# Altium PCB Backplane_PCB_v2.PcbDoc (part 1 of 2)
Units mm, origin at the board's own origin, x right, y up, seen from the top; angles counter-clockwise.
Board outline 92.34 x 177.99 mm, 4 copper layers (Top Layer, Signal Layer 1, Internal Plane 1, Bottom Layer), stack 1.47 mm thick; 65 components, 43 nets, 464 pads, 71 vias.
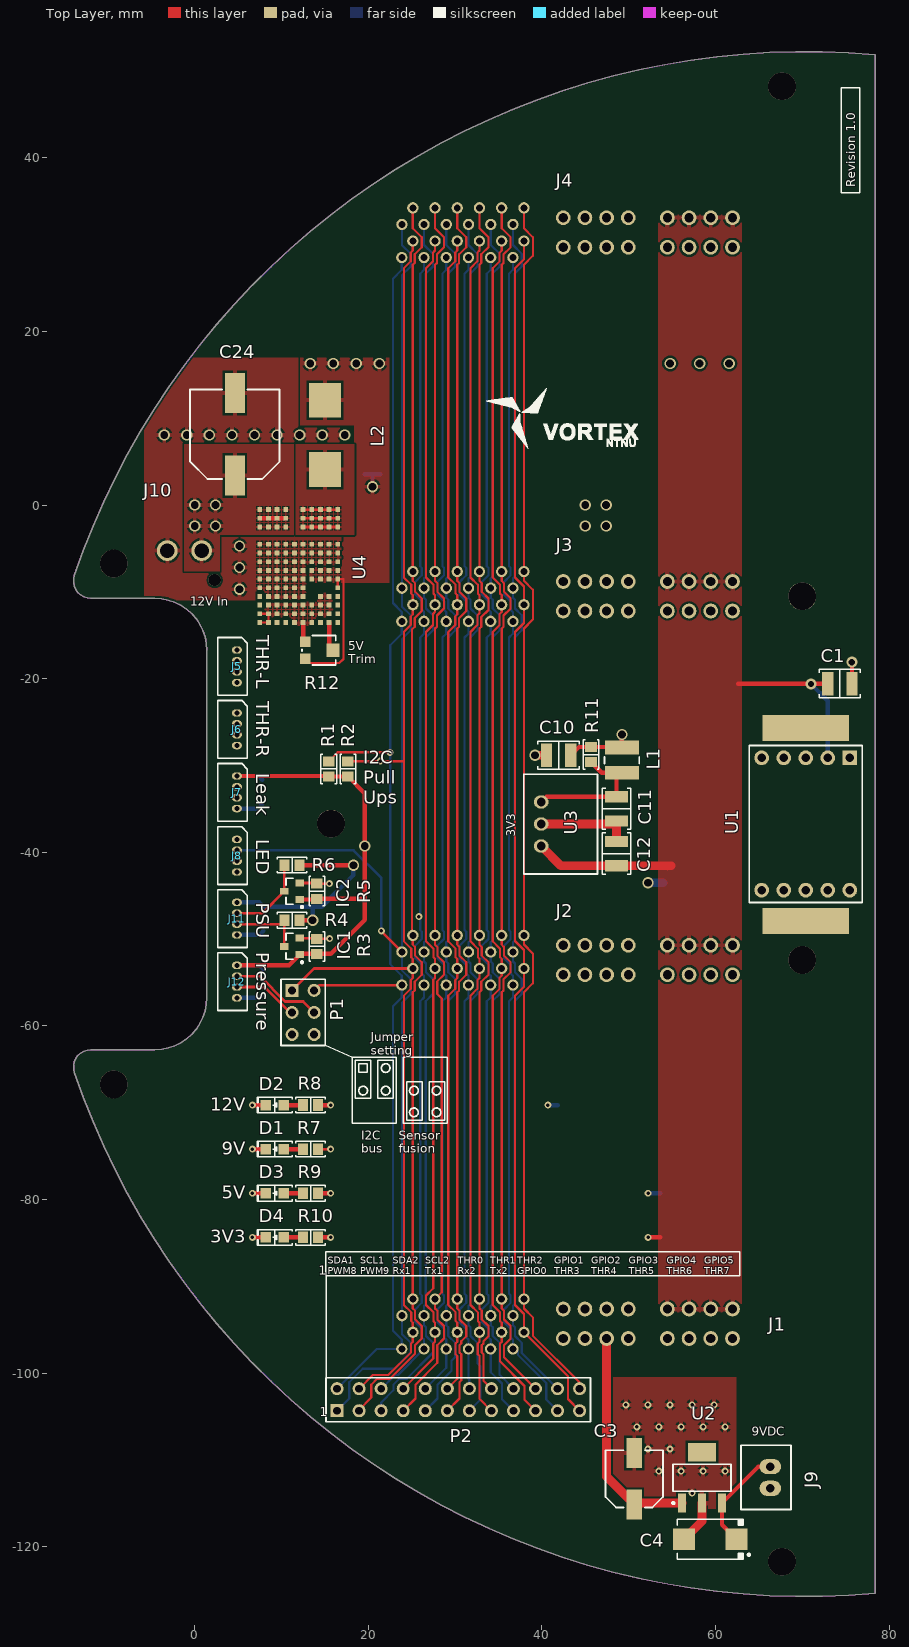
[diagram p0: Top Layer view]
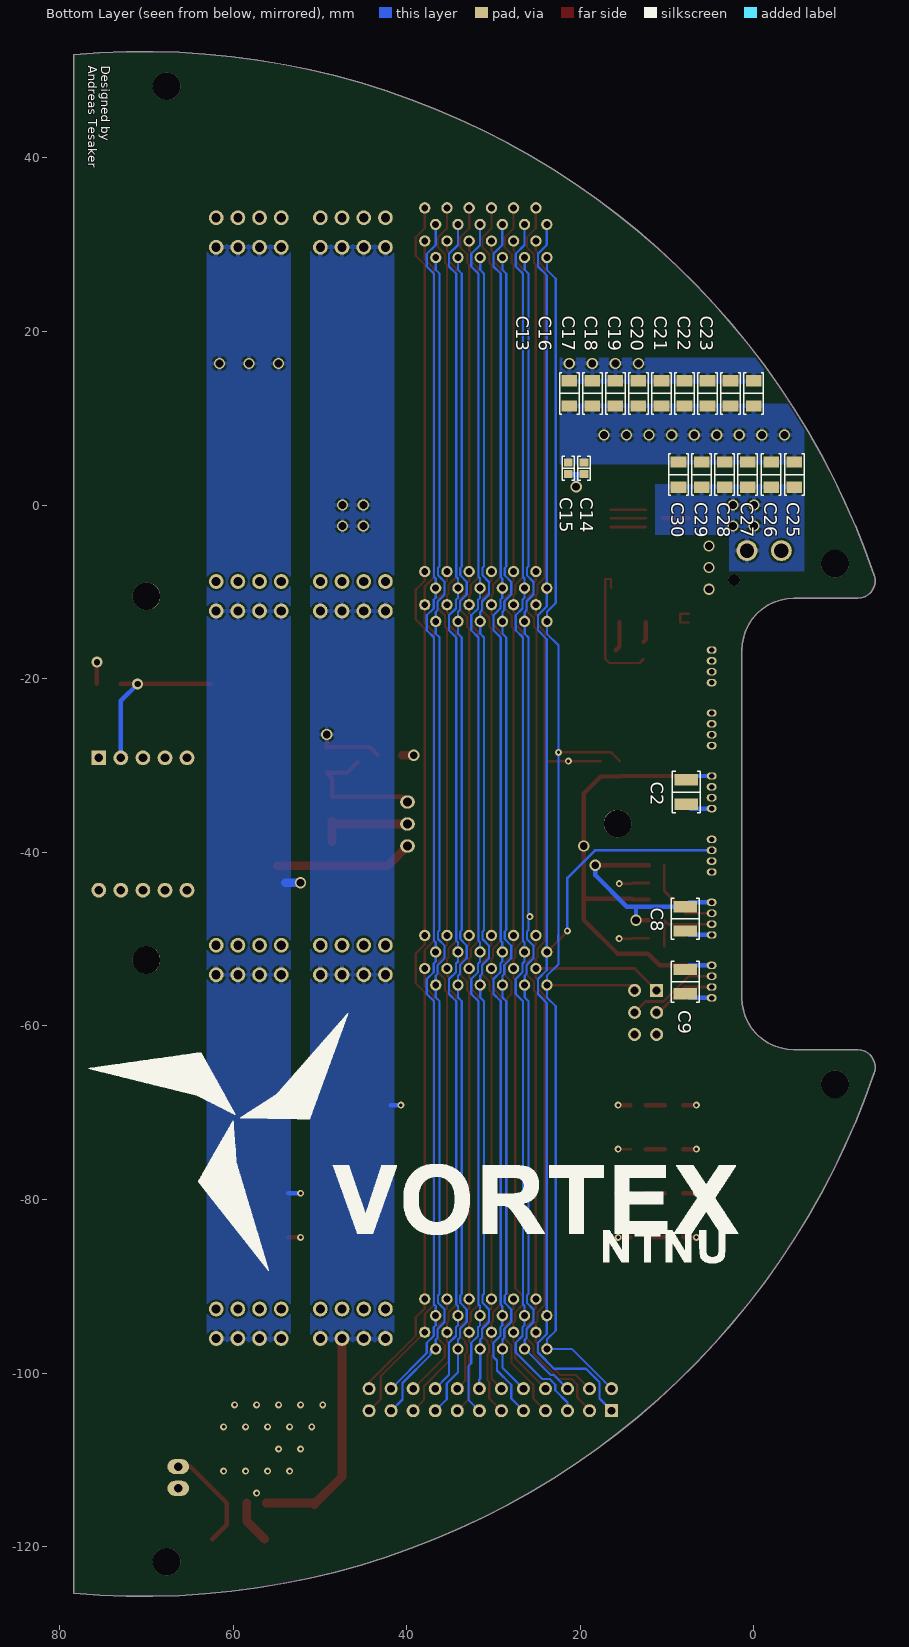
[diagram p1: Bottom Layer view, seen from below]
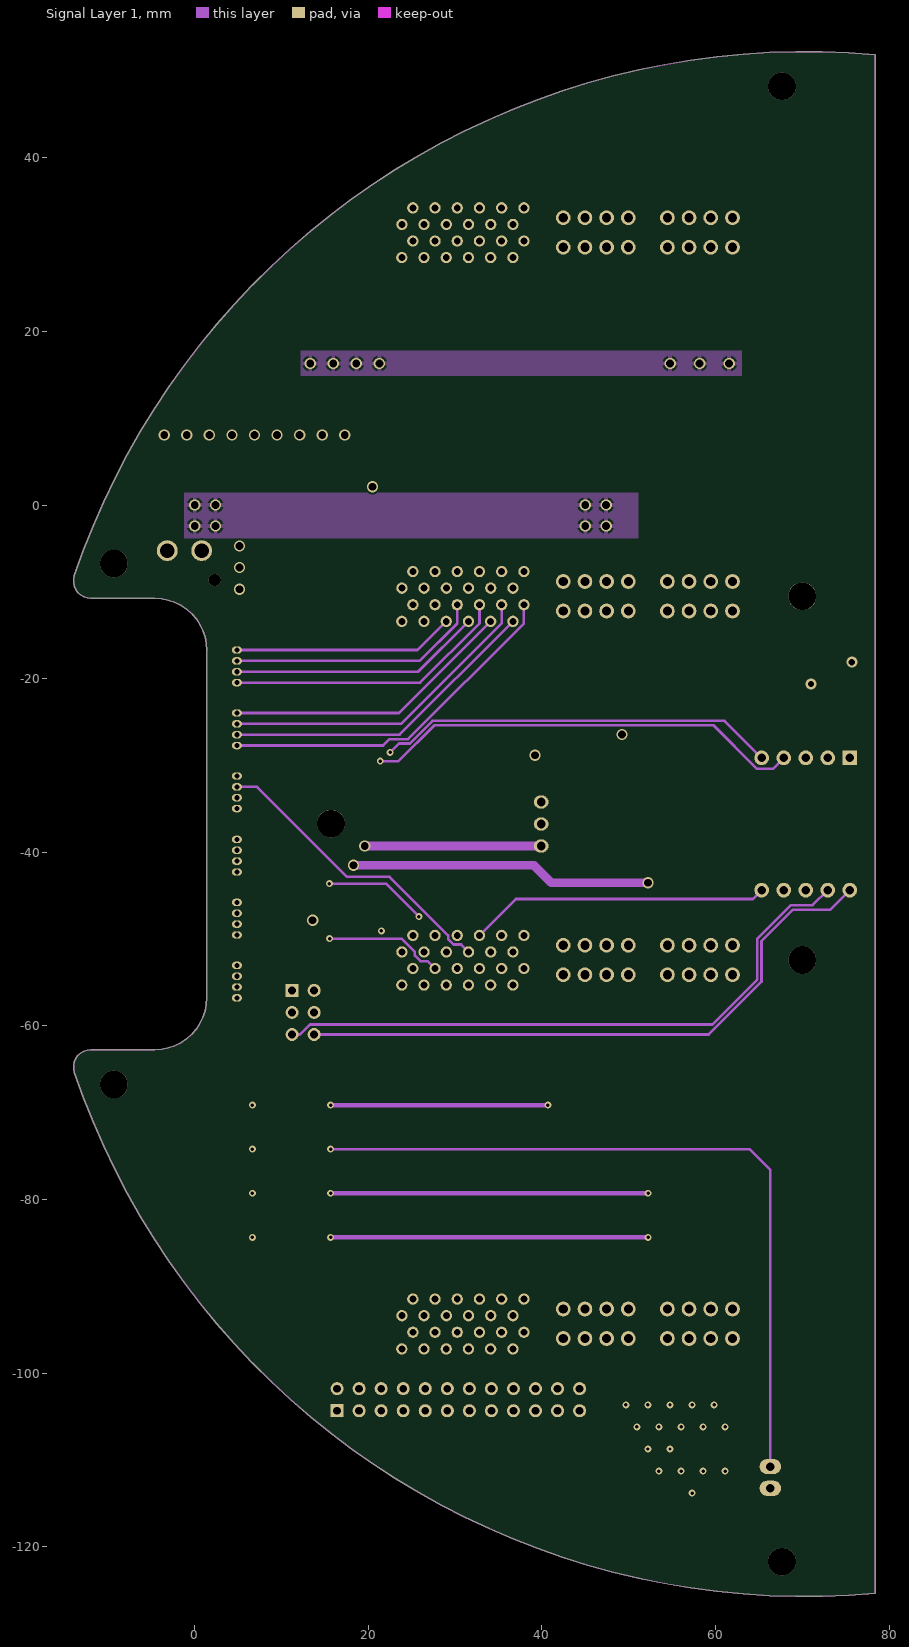
[diagram p2: Signal Layer 1]
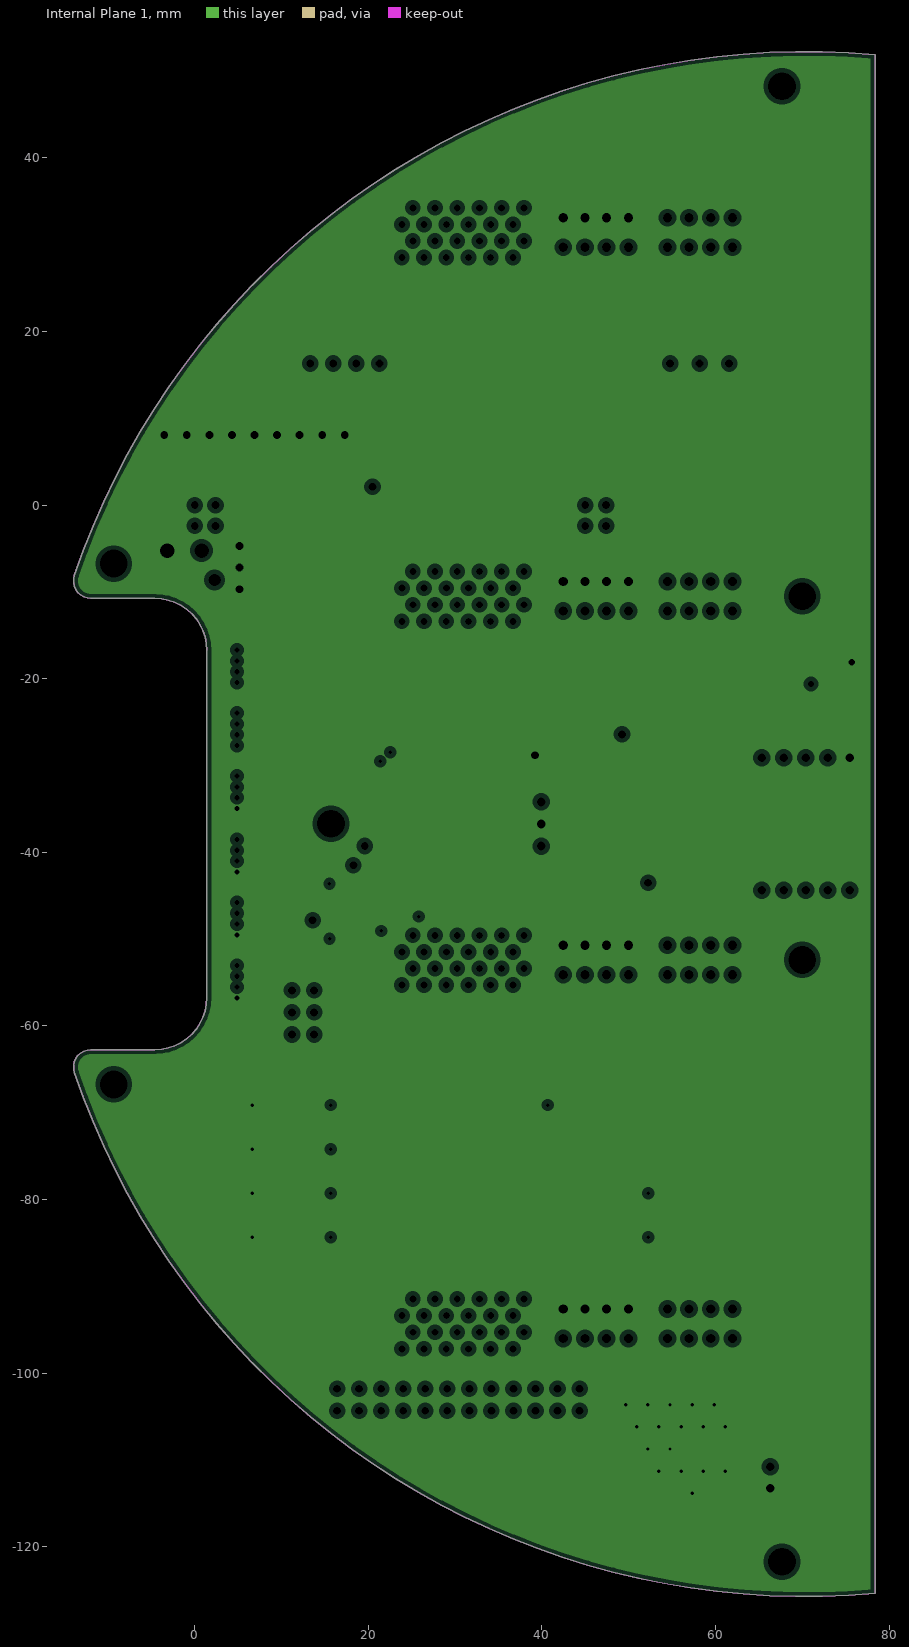
[diagram p3: Internal Plane 1, clearances drawn from the general rule]

## Layer stack, top to bottom
Top Solder: solder mask 0.0102, Solder Resist, Dk 3.5
Top Layer: signal copper 0.0356
Dielectric 1: core 0.6, FR-4, Dk 4.2
Signal Layer 1: signal copper 0.036
Dielectric 4: prepreg 0.127, Dk 4.2
Internal Plane 1: plane copper 0.036, net GND
Dielectric 3: core 0.6, Dk 4.2
Bottom Layer: signal copper 0.0356
Bottom Solder: solder mask 0.0102, Solder Resist, Dk 3.5

## Board outline
-13.86,-8.097 -13.953,-8.508 -13.958,-8.929 -13.874,-9.342 -13.706,-9.728 -13.461,-10.07 -13.149,-10.354 -12.786,-10.566 -12.385,-10.697 -11.967,-10.741 -4.596,-10.741 -3.812,-10.793 -3.043,-10.946 -2.299,-11.198 -1.596,-11.545 -0.943,-11.981 -0.353,-12.499 0.165,-13.089 0.601,-13.741 0.948,-14.445 1.2,-15.188 1.353,-15.958 1.404,-16.741 1.404,-56.741 1.353,-57.524 1.2,-58.294 0.948,-59.037 0.601,-59.741 0.165,-60.394 -0.353,-60.984 -0.943,-61.501 -1.596,-61.937 -2.299,-62.284 -3.043,-62.537 -3.812,-62.69 -4.596,-62.741 -11.967,-62.741 -12.385,-62.785 -12.786,-62.917 -13.149,-63.128 -13.461,-63.412 -13.706,-63.754 -13.874,-64.14 -13.958,-64.553 -13.953,-64.974 -13.86,-65.385 -12.832,-68.247 -11.707,-71.073 -10.486,-73.859 -9.17,-76.601 -7.762,-79.297 -6.262,-81.943 -4.673,-84.537 -2.996,-87.074 -1.233,-89.553 0.614,-91.97 2.542,-94.323 4.549,-96.608 6.633,-98.823 8.792,-100.966 11.022,-103.034 13.322,-105.024 15.689,-106.935 18.119,-108.764 20.611,-110.508 23.161,-112.167 25.766,-113.737 28.423,-115.217 31.129,-116.606 33.881,-117.902 36.675,-119.102 39.509,-120.207 42.379,-121.214 45.282,-122.122 48.214,-122.93 51.173,-123.638 54.153,-124.245 57.153,-124.749 60.168,-125.15 63.195,-125.449 66.23,-125.643 69.27,-125.734 72.312,-125.721 75.351,-125.604 78.385,-125.383 78.385,51.9 75.351,52.121 72.312,52.238 69.27,52.252 66.23,52.161 63.195,51.966 60.168,51.668 57.153,51.267 54.153,50.763 51.173,50.156 48.214,49.448 45.282,48.64 42.379,47.731 39.509,46.724 36.675,45.62 33.881,44.419 31.129,43.124 28.423,41.735 25.766,40.255 23.161,38.684 20.611,37.026 18.119,35.281 15.689,33.453 13.322,31.542 11.022,29.552 8.792,27.484 6.633,25.341 4.549,23.126 2.542,20.84 0.614,18.488 -1.233,16.071 -2.996,13.592 -4.673,11.054 -6.262,8.461 -7.762,5.815 -9.17,3.119 -10.486,0.377 -11.707,-2.409 -12.832,-5.235

## Design rules (kind name [scope] priority, off if disabled: settings)
Clearance Clearance_Signal [All] p1: gap=0.254 ignorepadtopadclearanceinfootprint=FALSE except(0: Arc-Hole Track-Hole SMDPad-Hole THPad-Hole Via-Hole Fill-Hole Poly-Hole Region-Hole Text-Hole; 0.2: Arc-Arc Arc-Track Track-Track)
Clearance [All] p2: gap=0.254 ignorepadtopadclearanceinfootprint=FALSE except(0: Arc-Hole Track-Hole SMDPad-Hole THPad-Hole Via-Hole Fill-Hole Poly-Hole Region-Hole Text-Hole)
PlaneClearance [All] p1: clearance=0.508
PlaneConnect [All] p1: planeconnectstyle=Relief reliefexpansion=0.508 reliefentries=4 reliefconductorwidth=0.254 reliefairgap=0.254
PolygonConnect "Ploygon Connect - Vicor" [(InNet('NetL2_1') AND InComponent('U4')) OR (InNet('12V') AND InComponent('U4')) OR (InNet('GND') AND InComponent('U4')) OR (InNet('5V') AND InComponent('U4')) OR (InNet('NetR12_1') AND InComponent('U4'))] p1: thpad.connectstyle=Relief thpad.reliefconductorwidth=0.254 thpad.reliefentries=4 thpad.polygonreliefangle="90 Angle" thpad.airgapwidth=0.254 smdpad.connectstyle=Relief smdpad.reliefconductorwidth=0.254 smdpad.reliefentries=4 smdpad.polygonreliefangle="90 Angle" smdpad.airgapwidth=0.127 via.connectstyle=Relief via.reliefconductorwidth=0.254 via.reliefentries=4 via.polygonreliefangle="90 Angle" via.airgapwidth=0.254
PolygonConnect [All] p2: connectstyle=Relief reliefconductorwidth=0.508 reliefentries=4 polygonreliefangle="90 Angle" airgapwidth=0.254
RoutingVias RoutingVias_PWR [(InNet('3V3') OR InNet('5V') OR InNet('12V') OR InNet('GND'))] p1: holewidth=0.9 width=1.3 viastyle="Through Hole" minholewidth=0.4 minwidth=0.8 maxholewidth=1.4 maxwidth=2.1
RoutingVias RoutingVias_Signal [All] p2: holewidth=0.7 width=1.1 viastyle="Through Hole" minholewidth=0.4 minwidth=0.8 maxholewidth=1.3 maxwidth=1.8
SolderMaskExpansion [All] p1: expansion=0.102
Width Width_PWR [(InNet('3V3') OR InNet('5V') OR InNet('12V') OR InNet('GND'))] p1: maxlimit=1.016 minlimit=0.254 preferedwidth=0.508
Width [All] p2: maxlimit=0.508 minlimit=0.254 preferedwidth=0.305
28 further rules are at their usual default settings.

## Classes and differential pairs
component class "U_OPID[351] 5V Step-down regulator v2": C13 C14 C15 C16 C17 C18 C19 C20 C21 C22 C23 C24 C25 C26 C27 C28 C29 C30 L2 R12 U4
component class "U_OPID[352] 3": C10 C11 C12 L1 R11 U3
component class Backplane: C1 C2 C3 C4 C8 C9 D1 D2 D3 D4 IC1 IC2 J1 J2 J3 J4 J5 J6 J7 J8 J9 J10 J11 J12 P1 P2 R1 R2 R3 R4 R5 R6 R7 R8 R9 R10 U1 U2

## Components (designator, comment, footprint, x,y, rotation, side; value= is the part's Value field where it differs from the comment)
C1 "10uF" "CAP 1210/3225 - 2.8MM" 74.33,-20.563 r180 top
C2 "10uF" "CAP 1210/3225 - 2.8MM" 7.785,-33.058 r90 bottom
C3 "22uF" "CAP ALUM 6.6MM" 50.639,-112.179 r90 top
C4 "22uF" "CAP POL 2917/7343" 59.394,-119.156 r180 top
C8 "10uF" "CAP 1210/3225 - 2.8MM" 7.912,-47.663 r90 bottom
C9 "10uF" "CAP 1210/3225 - 2.8MM" 7.912,-54.902 r90 bottom
C10 "10uF" "CAP 1210/3225 - 2.8MM" 41.921,-28.822 r0 top
C11 "10uF" "CAP 1210/3225 - 2.8MM" 48.595,-34.993 r90 top
C12 "10uF" "CAP 1210/3225 - 2.8MM" 48.595,-40.147 r270 top
C13 "0.10uF" "CAP 1206/3216 - 1.0MM" 21.272,12.863 r90 bottom
C14 "1uF" "CAP 0603/1608" 19.58,4.242 r270 bottom
C15 "1uF" "CAP 0603/1608" 21.384,4.242 r270 bottom
C16 "47uF" "CAP 1206/3216" 18.618,12.863 r90 bottom
C17 "47uF" "CAP 1206/3216" 15.963,12.863 r90 bottom
C18 "47uF" "CAP 1206/3216" 13.309,12.863 r90 bottom
C19 "47uF" "CAP 1206/3216" 10.655,12.863 r90 bottom
C20 "47uF" "CAP 1206/3216" 8.001,12.863 r90 bottom
C21 "47uF" "CAP 1206/3216" 5.346,12.863 r90 bottom
C22 "47uF" "CAP 1206/3216" 2.692,12.863 r90 bottom
C23 "47uF" "CAP 1206/3216" 0.038,12.863 r90 bottom
C24 "100uF" "CAP ALUM 10.3MM" 4.617,8.159 r90 top
C25 "22uF" "CAP 1206/3216" -4.648,3.518 r270 bottom
C26 "22uF" "CAP 1206/3216" -1.994,3.518 r270 bottom
C27 "22uF" "CAP 1206/3216" 0.724,3.518 r270 bottom
C28 "22uF" "CAP 1206/3216" 3.378,3.518 r270 bottom
C29 "22uF" "CAP 1206/3216" 6.033,3.518 r270 bottom
C30 "22uF" "CAP 1206/3216" 8.687,3.518 r270 bottom
D1 "Red" "LED 0805/2012 RED" 9.216,-74.206 r180 top value=Green
D2 "Red" "LED 0805/2012 RED" 9.216,-69.126 r180 top value=Green
D3 "Red" "LED 0805/2012 RED" 9.216,-79.286 r180 top value=Green
D4 "Red" "LED 0805/2012 RED" 9.216,-84.366 r180 top value=Green
IC1 "BSS138NH6327XTSA2" "INFINEON SOT-23-3" 11.214,-50.838 r180 top
IC2 "BSS138NH6327XTSA2" "INFINEON SOT-23-3" 11.218,-44.488 r180 top
J1 "0461144241" LPH_VERT.RECEPT._ASSY_4PX24S 23.856,-97.211 r180 top
J2 "0461144241" LPH_VERT.RECEPT._ASSY_4PX24S 23.856,-55.301 r180 top
J3 "0461144241" LPH_VERT.RECEPT._ASSY_4PX24S 23.856,-13.391 r180 top
J4 "0461144241" LPH_VERT.RECEPT._ASSY_4PX24S 23.856,28.519 r180 top
J5 "DF13-4P-1.25DSA" HDRV4W35P125_1X4_665X340X430P 4.864,-16.7 r270 top
J6 "DF13-4P-1.25DSA" HDRV4W35P125_1X4_665X340X430P 4.864,-23.954 r270 top
J7 "DF13-4P-1.25DSA" HDRV4W35P125_1X4_665X340X430P 4.864,-31.213 r270 top
J8 "DF13-4P-1.25DSA" HDRV4W35P125_1X4_665X340X430P 4.864,-38.519 r270 top
J9 "B2B-XH-A(LF)(SN)" "JST XH B2B-XH-A" 66.323,-112.027 r270 top
J10 "B2P-VH-FB-B(LF)(SN)" B2P-VH-FB-B 0.8,-5.245 r0 top
J11 "DF13-4P-1.25DSA" HDRV4W35P125_1X4_665X340X430P 4.864,-45.773 r270 top
J12 "DF13-4P-1.25DSA" HDRV4W35P125_1X4_665X340X430P 4.864,-53.028 r270 top
L1 "VLCF4028T-330MR61-2" "TDK VLCF4028-2" 49.22,-29.389 r270 top value=33uH
L2 "FPV1006-150-R" FPV1006-150-R 15.022,8.09 r90 top value=150nH
P1 "Header 3X2" HDR2X3 11.214,-55.911 r270 top
P2 "Header 12X2" HDR2X12 16.4,-104.34 r0 top
R1 "100k" "RES 0805/2012" 15.441,-30.391 r270 top
R2 "100k" "RES 0805/2012" 17.646,-30.391 r270 top
R3 "10k" "RES 0805/2012" 14.068,-50.838 r90 top
R4 "10k" "RES 0805/2012" 11.214,-47.834 r180 top
R5 "10k" "RES 0805/2012" 14.072,-44.488 r90 top
R6 "10k" "RES 0805/2012" 11.214,-41.484 r180 top
R7 "1.5k" "RES 0805/2012" 13.352,-74.206 r0 top
R8 "2k" "RES 0805/2012" 13.352,-69.126 r0 top
R9 "680" "RES 0805/2012" 13.352,-79.286 r0 top
R10 "330" "RES 0805/2012" 13.352,-84.366 r0 top
R11 "0.0" "RES 0805/2012" 45.666,-28.747 r270 top
R12 "500k" "POT Panasonic EVM" 14.262,-16.724 r270 top
U1 "Ultimate Sensor Fusion Solution" "Ultimate Sensor Fusion Solution" 70.396,-36.741 r270 top
U2 "LM2940IMP-9.0/NOPB" SOT230P700X180-4N 58.444,-112.052 r90 top
U3 "#NAME?" R-78Exx-1.0 39.916,-34.201 r270 top
U4 "#NAME?" PI34xx-00 16.484,-13.52 r0 top

## Footprints (in the part's own frame and the unit in brackets; to place one, negate y for a bottom-side part, rotate by r counter-clockwise, add the part's x,y. Pads: shape width x height; smd on the part's side, far side on the other; paste and mask are expansions set on the pad)
B2P-VH-FB-B [mm]
  round 2.4 hole 1.65 unplated: 1(0,0) 2(-3.96,0)
  body extent -6.88,-4.4 2.92,5.3, height 11
"CAP 0603/1608" [mm] "Chip Capacitor, 2-Leads, Body 1.60x0.80mm, IPC Medium Density"
  rect 0.9x1 smd: 1(-0.675,0) 2(0.675,0)
  silkscreen extent -1.4,-0.7 1.4,0.7, body extent -0.8,-0.41 0.8,0.41, height 0.82
"CAP 1206/3216" [mm] "Chip Capacitor, 2-Leads, Body 3.25x1.60mm, IPC Medium Density"
  rect 1.3x1.8 smd: 1(-1.45,0) 2(1.45,0)
  silkscreen extent -2.37,-1.12 2.37,1.12, body extent -1.6,-0.81 1.6,0.81, height 1.62
"CAP 1206/3216 - 1.0MM" [mm] "Chip Capacitor, 2-Leads, Body 3.25x1.60mm, IPC Medium Density"
  rect 1.3x1.8 smd: 1(-1.45,0) 2(1.45,0)
  silkscreen extent -2.37,-1.12 2.37,1.12, body extent -1.6,-0.8 1.6,0.8, height 1
"CAP 1210/3225 - 2.8MM" [mm] "Chip Capacitor, 2-Leads, Body 3.20x2.50mm, IPC Medium Density"
  rect 1.3x2.7 smd: 1(-1.4,0) 2(1.4,0)
  silkscreen extent -2.37,-1.63 2.37,1.63, body extent -1.6,-1.25 1.6,1.25, height 2.8
"CAP ALUM 6.6MM" [mm] "Aluminum Electrolytic Capacitor, Body 6.60x6.60x7.70mm, IPC Low Density"
  rect 3.45x1.8 smd: 1(-2.95,0) 2(2.95,0)
  silkscreen extent -3.3,-3.3 3.3,3.3, body extent -3.5,-3.3 3.5,3.3, height 7.7
"CAP ALUM 10.3MM" [mm] "Aluminum Electrolytic Capacitor, Body 10.30x10.30x10.50mm, IPC Low Density"
  rect 4.65x2.3 smd: 1(-4.75,0) 2(4.75,0)
  silkscreen extent -5.15,-5.15 5.15,5.15, body extent -5.8,-5.15 5.8,5.15, height 10.5
"CAP POL 2917/7343" [mm] "Molded Capacitor, 2-Leads, Body 7.30x4.30mm, IPC Medium Density"
  rect 2.55x2.45 smd: 1(-3.025,0) 2(3.025,0)
  silkscreen extent -4.58,-2.3 3.8,2.3, body extent -3.65,-2.15 3.65,2.15, height 4.1
FPV1006-150-R [mm]
  rect 4x3.7 smd: 1(-4,0) 2(4,0)
  body extent -5.05,-4.2 5.05,4.2, height 6.4
HDR2X3 [mm] "Connector; Header; 3x2 Position"
  rect 1.5x1.5 hole 0.9: 1(0,0)
  round 1.5 hole 0.9: 2(0,2.54) 3(2.54,0) 4(2.54,2.54) 5(5.08,0) 6(5.08,2.54)
  silkscreen extent -1.27,-1.27 6.35,3.81
HDR2X12 [mm] "Connector; Header; 12x2 Position"
  rect 1.5x1.5 hole 0.9: 1(0,0)
  round 1.5 hole 0.9: 2(0,2.54) 3(2.54,0) 4(2.54,2.54) 5(5.08,0) 6(5.08,2.54) 7(7.62,0) 8(7.62,2.54) 9(10.16,0) 10(10.16,2.54) 11(12.7,0) 12(12.7,2.54) 13(15.24,0) 14(15.24,2.54) 15(17.78,0) 16(17.78,2.54) 17(20.32,0) 18(20.32,2.54) 19(22.86,0) 20(22.86,2.54) 21(25.4,0) 22(25.4,2.54) 23(27.94,0) 24(27.94,2.54)
  silkscreen extent -1.27,-1.27 29.21,3.81
HDRV4W35P125_1X4_665X340X430P [mm]
  oval 0.85x1.15 hole 0.6 unplated: 1(0,0) 2(1.25,0) 3(2.5,0) 4(3.75,0)
  silkscreen extent -1.45,-2.2 5.2,1.2, body extent -1.45,-2.2 5.2,1.2, height 4.3
"INFINEON SOT-23-3" [mm] "SOT23, 3-Leads, Body 2.90x2.40mm, Pitch 0.95mm, IPC Medium Density"
  rect 0.972x0.802 smd: 1(-0.885,0.95) 2(0.885,0) 3(-0.885,-0.95)
  silkscreen extent -1.28,-1.5 0.7,1.95, body extent -1.16,-1.45 1.16,1.45, height 1
"JST XH B2B-XH-A" [mm]
  oval 1.75x2.5 hole 1: 1(-1.25,0) 2(1.25,0)
  silkscreen extent -3.7,-3.38 3.7,2.38, body extent -3.7,-3.38 3.7,2.38, height 7
"LED 0805/2012 RED" [mm] "Chip Diode, 2-Leads, Body 2.00x1.25mm, IPC Medium Density"
  rect 1.2x1.2 smd: 1(-1.05,0) 2(1.05,0)
  silkscreen extent -2.03,-0.9 2.03,0.9, body extent -1,-0.62 1,0.63, height 0.9
LPH_VERT.RECEPT._ASSY_4PX24S [mm]
  round 1.3 hole 0.8 unplated: 1(0,0) 2(-1.27,-1.91) 3(-2.56,0) 4(-3.83,-1.91) 5(-5.12,0) 6(-6.39,-1.91) 7(-7.68,0) 8(-8.95,-1.91) 9(-10.24,0) 10(-11.51,-1.91) 11(-12.8,0) 12(-14.07,-1.91) 13(-0.01,-3.82) 14(-1.27,-5.73) 15(-2.57,-3.82) 16(-3.83,-5.73) 17(-5.13,-3.82) 18(-6.39,-5.73) 19(-7.69,-3.82) 20(-8.95,-5.73) 21(-10.25,-3.82) 22(-11.51,-5.73) 23(-12.81,-3.82) 24(-14.07,-5.73)
  round 1.7 hole 1.05 unplated: P1A(-26.1,-1.19) P1A(-23.6,-1.19) P1A(-21.1,-1.19) P1A(-18.6,-1.19) P1B(-26.1,-4.59) P1B(-23.6,-4.59) P1B(-21.1,-4.59) P1B(-18.6,-4.59) P2A(-38.1,-1.19) P2A(-35.6,-1.19) P2A(-33.1,-1.19) P2A(-30.6,-1.19) P2B(-38.1,-4.59) P2B(-35.6,-4.59) P2B(-33.1,-4.59) P2B(-30.6,-4.59)
  body extent -40.54,-7.03 2.42,1.3, height 15.22
PI34xx-00 [mm]
  rect 0.55x0.55 smd: ADJ(-1,0) ADR0(-6,0) ADR1(-7,0) EAO(0,1) EN(0,2) NC(-9,2) NC(0,3) PGD(0,0) PGND(-9,5) PGND(-9,6) PGND(-9,7) PGND(-9,8) PGND(-9,9) PGND(-8,3) PGND(-8,4) PGND(-8,5) PGND(-8,6) PGND(-8,7) PGND(-8,8) PGND(-8,9) PGND(-7,3) PGND(-7,4) PGND(-7,5) PGND(-7,6) PGND(-7,7) PGND(-7,8) PGND(-7,9) PGND(-6,3) PGND(-6,4) PGND(-6,5) PGND(-6,6) PGND(-6,7) PGND(-6,8) PGND(-6,9) PGND(-5,3) PGND(-5,4) PGND(-5,5) PGND(-5,6) PGND(-5,7) PGND(-5,8) PGND(-5,9) PGND(-4,3) PGND(-4,4) PGND(-4,5) PGND(-4,6) PGND(-4,7) PGND(-4,8) PGND(-4,9) PGND(-3,7) PGND(-3,8) PGND(-3,9) PGND(-2,7) PGND(-2,8) PGND(-2,9) PGND(-1,7) PGND(-1,8) PGND(-1,9) PGND(0,7) PGND(0,8) PGND(0,9) REM(0,4) SCL(-4,0) SDA(-3,0) SGND(-9,0) SGND(-9,1) SGND(-8,0) SGND(-8,1) SGND(-8,2) SGND(-7,1) SGND(-7,2) SGND(-6,1) SGND(-6,2) SGND(-5,0) SGND(-5,1) SGND(-5,2) SGND(-4,1) SGND(-4,2) SGND(-3,1) SGND(-3,2) SGND(-2,1) SGND(-2,2) SGND(-2,3) SGND(-1,1) SGND(-1,2) SGND(-1,3) SYNCI(-9,4) SYNCO(-9,3) TRK(-2,0) VIN(-9,11) VIN(-9,12) VIN(-9,13) VIN(-8,11) VIN(-8,12) VIN(-8,13) VIN(-7,11) VIN(-7,12) VIN(-7,13) VIN(-6,11) VIN(-6,12) VIN(-6,13) VOUT(-3,5) VOUT(-3,6) VOUT(-2,5) VOUT(-2,6) VOUT(-1,5) VOUT(-1,6) VOUT(0,5) VOUT(0,6) VS1(-4,11) VS1(-4,12) VS1(-4,13) VS1(-3,11) VS1(-3,12) VS1(-3,13) VS1(-2,11) VS1(-2,12) VS1(-2,13) VS1(-1,11) VS1(-1,12) VS1(-1,13) VS1(0,11) VS1(0,12) VS1(0,13)
  body extent -9.47,-0.52 0.52,13.47, height 2.56
"POT Panasonic EVM" [mm] "Panasonic EVM3Y 3.45mm x 3.10mm x 1.55mm"
  rect 1.2x1.2 smd: 1(-1,-1.55) 3(1,-1.55)
  rect 1.6x1.5 smd: 2(0,1.65)
  silkscreen extent -1.7,-1.9 1.7,2, body extent -1.55,-1.9 1.55,1.85, height 1.55
R-78Exx-1.0 [mm]
  oval 1.5x1.7 hole 1: 1(0,0) 2(2.54,0) 3(5.08,0)
  silkscreen extent -3.2,-2 8.3,6.5, body extent -3.3,-1.95 8.3,6.55, height 10.4
"RES 0805/2012" [mm] "Chip Resistor, 2-Leads, Body 2.00x1.25mm, IPC Medium Density"
  rect 1.15x1.35 smd: 1(-0.875,0) 2(0.875,0)
  silkscreen extent -1.7,-0.9 1.7,0.9, body extent -0.95,-0.62 1.05,0.63, height 0.6
SOT230P700X180-4N [mm] "SOT223, 4-Leads, Body 6,50x7,00mm (avg), Pitch 2,30mm, IPC Medium Density"
  rect 2.15x0.9 smd: 1(-2.925,2.3) 2(-2.925,0) 3(-2.925,-2.3)
  rect 2.15x3.2 smd: 4(2.925,0)
  silkscreen extent -3.05,-3.35 1.55,3.42, body extent -3.5,-3.35 3.5,3.35, height 1.8
"TDK VLCF4028-2" [mm] "Precision Wire Wound Inductor, 2-Leads, Body 4.00x4.00mm, IPC Medium Density"
  rect 1.6x3.9 smd: 1(-1.45,0) 2(1.45,0)
  silkscreen extent -0.4,-2 0.4,2, body extent -2.05,-2 2.05,2, height 2.81
"Ultimate Sensor Fusion Solution" [mm]
  rect 1.7x1.7 hole 1: 1(-7.62,5.08)
  round 1.7 hole 1: 2(-7.62,2.54) 3(-7.62,0) 4(-7.62,-2.54) 5(-7.62,-5.08) 6(7.62,-5.08) 7(7.62,-2.54) 8(7.62,0) 9(7.62,2.54) 10(7.62,5.08)
  silkscreen extent -9.05,-6.5 9.05,6.5, body extent -8.89,-6.35 8.89,6.35, height 8.52

## Part data
C1 C2 C8 C9 C10 C11 C12: library part C3225X7S1H106M250AB, "CAP CER 10UF 50V X7S 1210", Device Package="1210 (3225 Metric)", Manufacturer="TDK Corporation", Supplier Part Number 1=445-4537-2-ND, TemperatureCoefficient=X7S, TemperatureRange="-55C ~ 125C", Tolerance=20%, Voltage=50V, ComponentLink1Description=Datasheet, ComponentLink1URL=https://product.tdk.com/info/en/catalog/datasheets/mlcc_commercial_general_en.pdf, ComponentLink2Description="Digi-Key Listing", ComponentLink2URL=https://www.digikey.com/product-detail/en/tdk-corporation/C3225X7S1H106M250AB/445-4537-2-ND/2042208, PartId=19089, Part Number=C3225X7S1H106M250AB, Price=0,3578, Supplier 1=Digi-Key
C3: library part UWJ1V220MCL1GB, "CAP ALUM 22UF 20% 35V SMD", Device Package="Radial, Can - SMD", Lifetime @ Temp="2000 Hrs @ 85C", Manufacturer=Nichicon, Ripple Current=45mA, Supplier Part Number 1=493-9805-2-ND, TemperatureRange="-40C ~ 85C", Tolerance=20%, Voltage=35V, ComponentLink1Description=Datasheet, ComponentLink1URL=http://nichicon-us.com/english/products/pdfs/e-wj.pdf, ComponentLink2Description="Digi-Key listing", ComponentLink2URL=http://digikey.com/product-detail/en/UWJ1V220MCL1GB/493-9805-2-ND/2550774, Impedance=-, PartId=7192, Part Number=UWJ1V220MCL1GB, Price=0,1009, Supplier 1=Digi-Key, Type="General Purpose"
C4: library part 293D226X0020D2TE3, "CAP TANT 22UF 20V 20% 2917", Device Package="2917 (7343 Metric)", Manufacturer="Vishay Sprague", Supplier Part Number 1=718-1063-2-ND, TemperatureRange="-55C ~ 125C", Tolerance=20%, Voltage=20V, ComponentLink1Description=Datasheet, ComponentLink1URL=http://www.vishay.com/docs/40002/293d.pdf, ComponentLink2Description="Digi-Key listing", ComponentLink2URL=http://digikey.com/product-detail/en/293D226X0020D2TE3/718-1063-2-ND/1559415, PartId=6865, Part Number=293D226X0020D2TE3, Price=0,3306, Supplier 1=Digi-Key, Type="General Purpose"
C13: library part GRM319R71H104KA01D, "CAP CER 0.1UF 50V X7R 1206", Device Package="1206 (3216 Metric)", Manufacturer="Murata Electronics North America", Supplier Part Number 1=490-1775-2-ND, TemperatureCoefficient=X7R, TemperatureRange="-55C ~ 125C", Tolerance=10%, Voltage=50V, ComponentLink1Description=Datasheet, ComponentLink1URL=http://www.murata.com/~/media/webrenewal/support/library/catalog/products/capacitor/mlcc/c02e.pdf, ComponentLink2Description="Digi-Key Listing", ComponentLink2URL=https://www.digikey.com/product-detail/en/murata-electronics-north-america/GRM319R71H104KA01D/490-1775-2-ND/586815, PartId=16942, Part Number=GRM319R71H104KA01D, Price=0,0231, Supplier 1=Digi-Key
C14 C15: library part GRM188R71C105KA12D, "CAP CER 1UF 16V X7R 0603", Device Package="0603 (1608 Metric)", Manufacturer="Murata Electronics North America", Supplier Part Number 1=490-3900-2-ND, TemperatureCoefficient=X7R, TemperatureRange="-55C ~ 125C", Tolerance=10%, Voltage=16V, ComponentLink1Description=Datasheet, ComponentLink1URL=http://www.murata.com/~/media/webrenewal/support/library/catalog/products/capacitor/mlcc/c02e.pdf, ComponentLink2Description="Digi-Key Listing", ComponentLink2URL=https://www.digikey.com/product-detail/en/murata-electronics-north-america/GRM188R71C105KA12D/490-3900-2-ND/965914, PartId=12965, Part Number=GRM188R71C105KA12D, Price=0,014, Supplier 1=Digi-Key
C16 C17 C18 C19 C20 C21 C22 C23: library part GRM31CR61A476ME15L, "CAP CER 47UF 10V X5R 1206", Device Package="1206 (3216 Metric)", Manufacturer="Murata Electronics North America", Supplier Part Number 1=490-5528-2-ND, TemperatureCoefficient=X5R, TemperatureRange="-55C ~ 85C", Tolerance=20%, Voltage=10V, ComponentLink1Description=Datasheet, ComponentLink1URL=http://www.murata.com/~/media/webrenewal/support/library/catalog/products/capacitor/mlcc/c02e.pdf, ComponentLink2Description="Digi-Key Listing", ComponentLink2URL=https://www.digikey.com/product-detail/en/murata-electronics-north-america/GRM31CR61A476ME15L/490-5528-2-ND/2334879, PartId=15800, Part Number=GRM31CR61A476ME15L, Price=0,2053, Supplier 1=Digi-Key
C24: library part UUX1H101MNL1GS, "CAP ALUM 100UF 20% 50V SMD", Device Package="Radial, Can - SMD", Lifetime @ Temp="2000 Hrs @ 105C", Manufacturer=Nichicon, Ripple Current=310mA, Supplier Part Number 1=493-6269-2-ND, TemperatureRange="-55C ~ 105C", Tolerance=20%, Voltage=50V, ComponentLink1Description=Datasheet, ComponentLink1URL=http://nichicon-us.com/english/products/pdfs/e-ux.pdf, ComponentLink2Description="Digi-Key listing", ComponentLink2URL=http://digikey.com/product-detail/en/UUX1H101MNL1GS/493-6269-2-ND/2550537, Impedance=-, PartId=7391, Part Number=UUX1H101MNL1GS, Price=0,2791, Supplier 1=Digi-Key, Type="General Purpose"
C25 C26 C27 C28 C29 C30: library part GRM31CR61E226KE15L, "CAP CER 22UF 25V X5R 1206", Device Package="1206 (3216 Metric)", Manufacturer="Murata Electronics North America", Supplier Part Number 1=490-5527-2-ND, TemperatureCoefficient=X5R, TemperatureRange="-55C ~ 85C", Tolerance=10%, Voltage=25V, ComponentLink1Description=Datasheet, ComponentLink1URL=http://www.murata.com/~/media/webrenewal/support/library/catalog/products/capacitor/mlcc/c02e.pdf, ComponentLink2Description="Digi-Key Listing", ComponentLink2URL=https://www.digikey.com/product-detail/en/murata-electronics-north-america/GRM31CR61E226KE15L/490-5527-2-ND/2334878, PartId=15793, Part Number=GRM31CR61E226KE15L, Price=0,1785, Supplier 1=Digi-Key
D1 D2 D3 D4: library part "LH R974-LP-1", "LED RED DIFFUSED 0805 SMD", Current (Test)=20mA, Device Package="0805 (2012 Metric)", Manufacturer="OSRAM Opto Semiconductors Inc.", Supplier Part Number 1=475-1415-2-ND, Voltage Forward=1.8V, Colour=Red, ComponentLink1Description=Datasheet, ComponentLink1URL=http://www.osram-os.com/Graphics/XPic8/00078869_0.pdf, ComponentLink2Description="Digi-Key Listing", ComponentLink2URL=http://www.digikey.ca/product-detail/en/LH%20R974-LP-1/475-1415-2-ND/1227932, Lens Transparency=Diffused, Millicandela=41mcd, PartId=7077, Part Number="LH R974-LP-1", Price=0,0621, Supplier 1=Digi-Key, Type="Surface Mount", Viewing Angle=160
IC1 IC2: "MOSFET N-CH 60V 230MA SOT-23", Current Continuous Drain="230mA (Ta)", Device Package="TO-236-3, SC-59, SOT-23-3", Drain to Source Voltage (Vdss)=60V, Input Capacitance (Ciss) at Vds="41pF @ 25V", Manufacturer="Infineon Technologies", Supplier Part Number 1=BSS138NH6327XTSA2CT-ND, ComponentLink1Description=Datasheet, ComponentLink1URL=http://www.infineon.com/dgdl/Infineon-BSS138N-DS-v02_86-en.pdf?fileId=db3a304330f68606013104d944d53efb, ComponentLink2Description="Digi-Key Listing", ComponentLink2URL=https://www.digikey.com/product-detail/en/infineon-technologies/BSS138NH6327XTSA2/BSS138NH6327XTSA2CT-ND/5413728, Gate Charge (Qg)="1.4nC @ 10V", PartId=29472, Part Number=BSS138NH6327XTSA2, Price=0,34, Rds On (Max) at Id, Vgs="3.5 Ohm @ 230mA, 10V", Supplier 1=Digi-Key, Type=N-Channel, Vgs(th) (Max) at Id=20V
J1 J2 J3 J4: Supplier Part Number 1=WM9739-ND, ComponentLink1Description="Manufacturer Link", ComponentLink1URL=http://www.molex.com/, ComponentLink2Description=Datasheet, ComponentLink2URL=http://www.molex.com/pdm_docs/sd/461144241_sd.pdf, Mounting Type="Through Hole", Number Of Positions=28, Number Of Rows=2, Part Number=0461144241, Supplier 1=Digi-Key
J5 J6 J7 J8 J11 J12: Supplier Part Number 1=H2193-ND, ComponentLink1Description="Manufacturer Link", ComponentLink1URL=https://www.hirose.com/, ComponentLink2Description=Datasheet, ComponentLink2URL=https://www.hirose.com/product/en/download_file/key_name/DF13/category/Catalog/doc_file_id/31687/?file_category_id=4&item_id=38&is_series=1, Mounting Type="Through Hole", Number Of Positions=4, Number Of Rows=1, Part Number=DF13-4P-1.25DSA, Supplier 1=Digi-Key
J9: "CONN HEADER XH TOP 2POS 2.5MM", Colour=Natural, Manufacturer="JST Sales America Inc.", Supplier Part Number 1=455-2247-ND, ComponentLink1Description=Datasheet, ComponentLink1URL=http://www.jst-mfg.com/product/pdf/eng/eXH.pdf, ComponentLink2Description="Digi-Key Listing", ComponentLink2URL=http://www.digikey.com/product-detail/en/jst-sales-america-inc/B2B-XH-A(LF)(SN)/455-2247-ND/1651045, Contact Finish=Tin, Fastening Type="Detent Lock", Number Of Positions=2, Number Of Rows=1, PartId=16449, Part Number=B2B-XH-A(LF)(SN), Pitch="0.098\" (2.50mm)", Price=0,15, Series=XH, Supplier 1=Digi-Key, Type="Header, Shrouded"
J10: Supplier Part Number 1=455-2947-ND, ComponentLink1Description="Manufacturer Link", ComponentLink1URL=http://www.jst.com, ComponentLink2Description=Datasheet, ComponentLink2URL=http://www.jst-mfg.com/product/pdf/eng/eVH.pdf, Number Of Positions=2, Number Of Rows=1, Part Number=B2P-VH-FB-B(LF)(SN), Supplier 1=Digi-Key
L1: "FIXED IND 33UH 610MA 350 MOHM", Current - Saturation=610mA, DC Resistance (DCR)="350 mOhm Max", Device Package=Nonstandard, Inductance=33uH, Manufacturer="TDK Corporation", Operating Temperature="-40C ~ 105C", Supplier Part Number 1=445-6549-2-ND, Tolerance=20%, ComponentLink1Description=Datasheet, ComponentLink1URL=https://product.tdk.com/info/en/catalog/datasheets/inductor_commercial_power_vlcf4028-2_en.pdf, ComponentLink2Description="Digi-Key Listing", ComponentLink2URL=https://www.digikey.com/product-detail/en/tdk-corporation/VLCF4028T-330MR61-2/445-6549-2-ND/2465306, Current Rating=610mA, Material - Core=Ferrite, PartId=16423, Part Number=VLCF4028T-330MR61-2, Price=0,441, Series=VLCF, Shielding=Shielded, Supplier 1=Digi-Key, Type=Wirewound
L2: "FIXED IND 150NH 25A 0.41 MOHM", Supplier Part Number 1=283-4578-2-ND, ComponentLink1Description="Manufacturer Link", ComponentLink1URL=http://www.eaton.no/EatonNO/index.htm, ComponentLink2Description=Datasheet, ComponentLink2URL=http://www.cooperindustries.com/content/dam/public/bussmann/Electronics/Resources/product-datasheets/bus-elx-ds-10390-fpv1006.pdf, Irms=25, Part Number=FPV1006-150-R, Supplier 1=Digi-Key
P1: "Header, 3-Pin, Dual row", LatestRevisionDate=17-Jul-2002, LatestRevisionNote="Re-released for DXP Platform.", Publisher="Altium Limited"
P2: "Header, 12-Pin, Dual row", LatestRevisionDate=17-Jul-2002, LatestRevisionNote="Re-released for DXP Platform.", Publisher="Altium Limited"
R1 R2: library part ERJ-6ENF1003V, "RES SMD 100K OHM 1% 1/8W 0805", Device Package="0805 (2012 Metric)", Manufacturer="Panasonic Electronic Components", PowerRating="0.125W, 1/8W", Supplier Part Number 1=P100KCTR-ND, TemperatureCoefficient=100ppm/C, TemperatureRange="-55C ~ 155C", Tolerance=1%, ComponentLink1Description=Datasheet, ComponentLink1URL=http://industrial.panasonic.com/www-cgi/jvcr13pz.cgi?E+PZ+3+AOA0002+ERJ6ENF1003V+7+WW, ComponentLink2Description="Digi-Key listing", ComponentLink2URL=http://digikey.com/product-detail/en/ERJ-6ENF1003V/P100KCTR-ND/111841, PartId=1950, Part Number=ERJ-6ENF1003V, Price=0,0073, Supplier 1=Digi-Key, Type="Thick Film"
R3 R4 R5 R6: library part ERJ-6ENF1002V, "RES SMD 10K OHM 1% 1/8W 0805", Device Package="0805 (2012 Metric)", Manufacturer="Panasonic Electronic Components", PowerRating="0.125W, 1/8W", Supplier Part Number 1=P10.0KCTR-ND, TemperatureCoefficient=100ppm/C, TemperatureRange="-55C ~ 155C", Tolerance=1%, ComponentLink1Description=Datasheet, ComponentLink1URL=http://industrial.panasonic.com/www-cgi/jvcr13pz.cgi?E+PZ+3+AOA0002+ERJ6ENF1002V+7+WW, ComponentLink2Description="Digi-Key listing", ComponentLink2URL=http://digikey.com/product-detail/en/ERJ-6ENF1002V/P10.0KCTR-ND/111474, PartId=1947, Part Number=ERJ-6ENF1002V, Price=0,0073, Supplier 1=Digi-Key, Type="Thick Film"
R7: library part ERA-6AEB152V, "RES SMD 1.5K OHM 0.1% 1/8W 0805", Device Package="0805 (2012 Metric)", Manufacturer="Panasonic Electronic Components", PowerRating="0.125W, 1/8W", Supplier Part Number 1=P1.5KDATR-ND, TemperatureCoefficient=25ppm/C, TemperatureRange="-55C ~ 155C", Tolerance=0.1%, ComponentLink1Description=Datasheet, ComponentLink1URL=http://industrial.panasonic.com/lecs/www-data/pdf/AOA0000/AOA0000CE26.pdf, ComponentLink2Description="Digi-Key listing", ComponentLink2URL=http://digikey.com/product-detail/en/ERA-6AEB152V/P1.5KDATR-ND/1465753, PartId=2578, Part Number=ERA-6AEB152V, Price=0,0653, Supplier 1=Digi-Key, Type="Thin Film"
R8: library part ERA-6AEB202V, "RES SMD 2K OHM 0.1% 1/8W 0805", Device Package="0805 (2012 Metric)", Manufacturer="Panasonic Electronic Components", PowerRating="0.125W, 1/8W", Supplier Part Number 1=P2.0KDATR-ND, TemperatureCoefficient=25ppm/C, TemperatureRange="-55C ~ 155C", Tolerance=0.1%, ComponentLink1Description=Datasheet, ComponentLink1URL=http://industrial.panasonic.com/lecs/www-data/pdf/AOA0000/AOA0000CE26.pdf, ComponentLink2Description="Digi-Key listing", ComponentLink2URL=http://digikey.com/product-detail/en/ERA-6AEB202V/P2.0KDATR-ND/1465756, PartId=2444, Part Number=ERA-6AEB202V, Price=0,055, Supplier 1=Digi-Key, Type="Thin Film"
R9: library part ERJ-6ENF6800V, "RES SMD 680 OHM 1% 1/8W 0805", Device Package="0805 (2012 Metric)", Manufacturer="Panasonic Electronic Components", PowerRating="0.125W, 1/8W", Supplier Part Number 1=P680CTR-ND, TemperatureCoefficient=100ppm/C, TemperatureRange="-55C ~ 155C", Tolerance=1%, ComponentLink1Description=Datasheet, ComponentLink1URL=http://industrial.panasonic.com/www-cgi/jvcr13pz.cgi?E+PZ+3+AOA0002+ERJ6ENF6800V+7+WW, ComponentLink2Description="Digi-Key listing", ComponentLink2URL=http://digikey.com/product-detail/en/ERJ-6ENF6800V/P680CTR-ND/1746526, PartId=2226, Part Number=ERJ-6ENF6800V, Price=0,0073, Supplier 1=Digi-Key, Type="Thick Film"
R10: library part ERJ-P06J331V, "RES SMD 330 OHM 5% 1/2W 0805", Device Package="0805 (2012 Metric)", Manufacturer="Panasonic Electronic Components", PowerRating="0.5W, 1/2W", Supplier Part Number 1=P330ADTR-ND, TemperatureCoefficient=200ppm/C, TemperatureRange="-55C ~ 155C", Tolerance=5%, ComponentLink1Description=Datasheet, ComponentLink1URL=//media.digikey.com/pdf/Data%20Sheets/Panasonic%20Electronic%20Components/ERJ_PA2_P03_PA3_P06_P08_P14.pdf, ComponentLink2Description="Digi-Key Listing", ComponentLink2URL=https://www.digikey.com/product-detail/en/panasonic-electronic-components/ERJ-P06J331V/P330ADTR-ND/525256, PartId=11579, Part Number=ERJ-P06J331V, Price=0,0129, Supplier 1=Digi-Key
R11: library part 5106, "RES SMD 0.0 OHM JUMPER 1/2W 0805", Device Package="0805 (2012 Metric)", Manufacturer="Keystone Electronics", PowerRating="0.5W, 1/2W", Supplier Part Number 1=36-5106TR-ND, Tolerance=Jumper, ComponentLink1Description=Datasheet, ComponentLink1URL=http://www.keyelco.com/product-pdf.cfm?p=14039, ComponentLink2Description="Digi-Key Listing", ComponentLink2URL=https://www.digikey.com/product-detail/en/keystone-electronics/5106/36-5106TR-ND/5118868, PartId=16148, Part Number=5106, Price=0,2505, Supplier 1=Digi-Key
R12: library part EVM-3YSX50B55, "TRIMMER 500K OHM 0.15W SMD", Manufacturer="Panasonic Electronic Components", PowerRating=0.15W, Supplier Part Number 1=P3Y504TR-ND, TemperatureCoefficient=250ppm/C, Tolerance=25%, Adjustment Type="Top Adjustment", ComponentLink1Description=Datasheet, ComponentLink1URL=http://media.digikey.com/pdf/Data%20Sheets/Panasonic%20Resistors%20Thermistors%20PDFs/EVM-3Y_S_R_Rev2010.pdf, ComponentLink2Description="Digi-Key Listing", ComponentLink2URL=http://www.digikey.ca/product-detail/en/EVM-3YSX50B55/P3Y504TR-ND/259783, Number Of Turns=Single, PartId=7181, Part Number=EVM-3YSX50B55, Price=0,2543, Supplier 1=Digi-Key, Type="Surface Mount"
U2: Supplier Part Number 1=LM2940IMP-9.0/NOPBCT-ND, ComponentLink1Description="Manufacturer Link", ComponentLink1URL=http://www.ti.com, ComponentLink2Description=Datasheet, ComponentLink2URL=http://www.ti.com/lit/ds/symlink/lm2940-n.pdf, Iout,max=1A, Part Number=LM2940IMP-9.0/NOPB, Supplier 1=Digi-Key, Vin,max=26V, Vin,min=10V, Vout,nom=9V
U3: library part R-78E3.3-1.0, Supplier Part Number 1=945-2409-5-ND, ComponentLink1Description="Manufacturer Link", ComponentLink1URL=https://www.recom-power.com/, ComponentLink2Description=Datasheet, ComponentLink2URL=https://www.recom-power.com/pdf/Innoline/R-78Exx-1.0.pdf, Iout,max=1A, Part Number=R-78E3.3-1.0, Supplier 1=Digi-Key, Vin,max=28V, Vin,min=7V, Vout,nom=3.3V
U4: library part PI3424-00-LGIZ, Supplier Part Number 1=1102-1641-ND, ComponentLink1Description="Manufacturer Link", ComponentLink1URL=http://www.vicorpower.com/, ComponentLink2Description=Datasheet, ComponentLink2URL=http://vicorpower.com/documents/datasheets/Picor/ds_pi34xx-00.pdf, Iout,max=15A, Part Number=PI3424-00-LGIZ, Supplier 1=Digi-Key, Vin,max=18V, Vin,min=8V, Vout,nom=5V
U1: ComponentLink1Description="Manufacturer Link", ComponentLink1URL=https://www.tindie.com/products/onehorse/ultimate-sensor-fusion-solution/, ComponentLink2Description=Datasheet, ComponentLink2URL=https://github.com/kriswiner/EM7180_SENtral_sensor_hub/wiki, Part Number="Ultimate Sensor Fusion Solution"

## Free pads (board coordinates)
  round 3.2 hole 3.2: 1(-9.335,-66.741) 1(-9.335,-6.741) 1(15.7,-36.7) 1(67.665,-121.741) 1(67.665,48.259) 1(70,-52.4) 1(70,-10.5)
  rect 10x3 smd: 1(70.4,-47.9)
  rect 10x3 smd paste+0: 2(70.4,-25.7)

## Via types
v1: diameter 0.8, hole 0.4, Top Layer to Bottom Layer, 34 vias
v2: diameter 1.3, hole 0.9, Top Layer to Bottom Layer, 34 vias
v3: diameter 1.27, hole 0.711, Top Layer to Bottom Layer, 2 vias
v4: diameter 1.4, hole 1.4, Top Layer to Bottom Layer, 1 vias

## Nets (pads, with @x,y where several pads share a name; then routed paths per layer and width w, separated by ;. In a path a pad name is that pad's centre, name@x,y a point inside that pad or via, vN(x,y) a via of type N, cw(c..) or ccw(c..) an arc to the next point about the centre after c; other vN are vias at no path point)
3V3: C1.2 C2.2 C9.2 C12.2 IC1.1 IC2.1 J1.P2B J2.P2B J3.P2B J4.P2B J7.1 J12.1 R1.2 R2.2 R3.1 R5.1 R10.2 U1.2 U3.3 | length 156.7
  Top Layer w0.254: 54.456,-41.973 54.882,-41.547
  Top Layer w0.508: J12.1 10.859,-53.028 12.174,-51.713 15.673,-51.713 19.596,-47.79 v2(19.596,-39.281) 19.596,-33.216 R2.2 R1.2 15.388,-31.213 J7.1 ; IC2.1 13.997,-45.438 R5.1 19.497,-45.363 ; R10.2 v1(15.659,-84.366) ; v1(52.235,-84.366) 53.632,-84.366 ; 62.6,-20.6 v3(71,-20.6) ; v3@71,-20.563 C1.2 C1.2@72.936,-20.569
  Top Layer w1.016: U3.3 42.182,-41.547 54.882,-41.547
  Signal Layer 1 w0.508: v1(15.659,-84.366) v1(52.235,-84.366)
  Signal Layer 1 w1.016: v2(19.596,-39.281) U3.3
  Bottom Layer w0.508: J12.1 7.437,-53.028 C9.2 ; J7.1 7.34,-31.213 C2.2 ; v3(71,-20.6) 72.936,-22.536 U1.2
5V: C8.2 C13.2 C14.2 C15.2 C16.2 C17.2 C18.2 C19.2 C20.2 C21.2 C22.2 C23.2 J1.P2A J2.P2A J3.P2A J4.P2A J11.1 L2.2 R4.1 R6.1 R9.2 R12.3 U4.REM U4.VOUT | length 120.4
  Top Layer w0.254: R12.3 13.188,-18.2 16.664,-18.2 17.14,-17.724 17.14,-8.52 16.484,-8.52 U4.REM
  Top Layer w0.508: R4.1 v2(13.583,-47.834) ; R6.1 v2(18.282,-41.484) ; R9.2 v1(15.659,-79.286)
  Signal Layer 1 w0.508: v1(15.659,-79.286) v1(52.235,-79.286)
  Signal Layer 1 w1.016: v2(18.282,-41.484) 39.071,-41.484 41.088,-43.501 v2(52.235,-43.501)
  Bottom Layer w0.508: J11.1 7.422,-45.773 C8.2 13.58,-46.263 ; v2(13.583,-47.834) 13.583,-46.266 14.643,-46.266 18.282,-42.627 v2(18.282,-41.484) ; C14.2 20.482,3.567 ; v2(20.482,2.113) 20.482,3.567 ; C15.2 20.482,3.567 ; v1(52.235,-79.286) 53.632,-79.286
  Bottom Layer w1.016: v2(52.235,-43.501) 53.984,-43.501
  other v2: 13.31,16.313 15.964,16.313 18.618,16.313 21.272,16.313 54.772,16.313 58.172,16.313 61.572,16.313
12V: C3.1 C10.2 C24.1 C25.2 C26.2 C27.2 C28.2 C29.2 C30.2 J1.P1A J2.P1A J3.P1A J4.P1A J10.1 L1.1 R8.2 R11.1 U2.1 U4.VIN | length 64.4
  Top Layer w0.508: U4.VIN@7.484,-1.52 8.484,-1.52 9.484,-1.52 U4.VIN@10.484,-1.52 ; R8.2 v1(15.659,-69.126) ; C10.2 44.271,-27.872 49.154,-27.872 L1.1 v2(49.22,-26.421)
  Top Layer w1.016: J1.P1A@47.456,-96.021 47.456,-111.946 C3.1 50.792,-114.977 U2.1
  Signal Layer 1 w0.508: v1(15.659,-69.126) v1(40.678,-69.126)
  Bottom Layer w0.508: v1(40.678,-69.126) 41.821,-69.126
  other v2: 0,-2.4 2.4,-2.4 45,-2.4 47.4,-2.4 0,0 2.4,0 45,0 47.4,0
GND: C1.1 C2.1 C3.2 C4.2 C8.1 C9.1 C10.1 C11.1 C12.1 C13.1 C14.1 C15.1 C16.1 C17.1 C18.1 C19.1 C20.1 C21.1 C22.1 C23.1 C24.2 C25.1 C26.1 C27.1 C28.1 C29.1 C30.1 D1.2 D2.2 D3.2 D4.2 J1.P1B J2.P1B J3.P1B J4.P1B J7.4 J8.4 J9.2 J10.2 J11.4 J12.4 U1.1 U2.2 U3.2 U4.PGND U4.SYNCI | length 36.1
  Top Layer w0.508: v1(6.642,-84.366) D4.2 ; v1(6.642,-79.286) D3.2 ; v1(6.642,-74.206) D1.2 ; v1(6.642,-69.126) D2.2 ; U1.1 U1.1@75.73,-28.867 ; v3(75.7,-18.1) 75.73,-18.13 C1.1
  Top Layer w1.016: v2(39.199,-28.822) C10.1 ; U3.2 48.247,-36.741 C11.1 C12.1 ; C4.2 58.444,-117.081 U2.2
  Bottom Layer w0.508: J12.4 7.436,-56.778 C9.1 ; J11.4 7.452,-49.523 C8.1 ; J7.4 7.28,-34.963 C2.1
  other v1: 57.298,-113.83 53.488,-111.29 56.028,-111.29 58.568,-111.29 61.108,-111.29 52.218,-108.75 54.758,-108.75 50.948,-106.21 53.488,-106.21 56.028,-106.21 58.568,-106.21 61.108,-106.21 49.678,-103.67 52.218,-103.67 54.758,-103.67 57.298,-103.67 59.838,-103.67
  other v2: 5.164,-9.7 5.164,-7.2 5.164,-4.7 -3.516,8.08 -0.916,8.08 1.684,8.08 4.284,8.08 6.884,8.08 9.484,8.08 12.084,8.08 14.684,8.08 17.284,8.08
GPIO0: J1.19 J2.19 J3.19 J4.19 J7.2 P2.13 | length 175.1
  Signal Layer 1 w0.305: J7.2 7.19,-32.463 17.564,-42.837 22.446,-42.837 29.19,-49.581 29.19,-50.009 29.808,-50.628 30.692,-50.628 J2.19
  Bottom Layer w0.254: J4.19 31.546,29.967 32.567,28.946 32.567,27.488 31.731,26.652 31.731,-8.276 31.546,-8.461 31.546,-10.681 31.775,-10.91 31.775,-11.908 32.567,-12.7 32.567,-14.422 31.731,-15.258 31.731,-50.186 31.546,-50.371 31.546,-52.591 31.775,-52.82 31.775,-53.818 32.567,-54.61 32.567,-56.332 31.731,-57.168 31.731,-92.096 31.546,-92.281 J1.19 31.546,-94.501 31.775,-94.73 31.775,-95.728 32.567,-96.52 32.567,-98.867 32.9,-99.2 32.9,-103.08 P2.13
GPIO1: J1.20 J2.20 J3.20 J4.20 P2.16 U1.6 | length 174.5
  Top Layer w0.254: J4.20 32.806,31.887 33.837,30.856 33.837,29.718 33.021,28.902 33.021,27.904 32.806,27.689 32.806,-8.731 33.075,-9 33.075,-9.998 33.837,-10.76 33.837,-12.086 33.021,-12.902 33.021,-14.006 32.806,-14.221 32.806,-50.641 33.075,-50.91 33.075,-51.908 33.837,-52.67 33.837,-54.102 33.021,-54.918 33.021,-55.916 32.806,-56.131 J1.20 32.806,-92.551 33.075,-92.82 33.075,-93.818 33.837,-94.58 33.837,-95.755 33.26,-96.332 33.26,-96.589 33.065,-96.784 33.065,-97.638 33.26,-97.833 33.26,-100.88 P2.16
  Signal Layer 1 w0.305: J2.20 37,-45.377 64.3,-45.377 U1.6
GPIO2: J1.21 J2.21 J3.21 J4.21 P2.18 | length 137.8
  Bottom Layer w0.254: J4.21 34.106,29.967 35.127,28.946 35.127,27.488 34.291,26.652 34.291,-8.276 34.106,-8.461 34.106,-10.681 34.335,-10.91 34.335,-11.908 35.127,-12.7 35.127,-14.422 34.291,-15.258 34.291,-50.186 34.106,-50.371 34.106,-52.591 34.335,-52.82 34.335,-53.818 35.127,-54.61 35.127,-56.332 34.291,-57.168 34.291,-92.096 34.106,-92.281 J1.21 34.106,-94.501 34.335,-94.73 34.335,-95.728 35.127,-96.52 35.127,-100.207 P2.18
GPIO3: J1.22 J2.22 J3.22 J4.22 P2.20 | length 140.9
  Top Layer w0.254: J4.22 35.366,31.887 36.397,30.856 36.397,29.718 35.581,28.902 35.581,27.904 35.366,27.689 35.366,-8.731 35.635,-9 35.635,-9.998 36.397,-10.76 36.397,-11.908 35.581,-12.724 35.581,-14.006 35.366,-14.221 35.366,-50.641 35.635,-50.91 35.635,-51.908 36.397,-52.67 36.397,-53.818 35.581,-54.634 35.581,-55.916 35.366,-56.131 J1.22 35.366,-92.551 35.635,-92.82 35.635,-93.818 36.397,-94.58 36.397,-96.012 35.625,-96.784 35.625,-98.165 P2.20
GPIO4: J1.23 J2.23 J3.23 J4.23 P2.22 | length 138.8
  Bottom Layer w0.254: J4.23 36.666,29.967 37.687,28.946 37.687,27.488 36.851,26.652 36.851,-8.276 36.666,-8.461 36.666,-10.681 36.895,-10.91 36.895,-11.908 37.687,-12.7 37.687,-14.422 36.851,-15.258 36.851,-50.186 36.666,-50.371 36.666,-52.591 36.895,-52.82 36.895,-53.818 37.687,-54.61 37.687,-56.332 36.851,-57.168 36.851,-92.096 36.666,-92.281 J1.23 36.666,-94.501 36.895,-94.73 36.895,-95.728 37.687,-96.52 37.687,-97.687 P2.22
GPIO5: J1.24 J2.24 J3.24 J4.24 P2.24 | length 141.3
  Top Layer w0.254: J4.24 37.926,31.887 38.957,30.856 38.957,28.72 37.926,27.689 37.926,-8.731 38.957,-9.762 38.957,-13.19 37.926,-14.221 37.926,-50.619 38.957,-51.65 38.957,-55.1 37.926,-56.131 J1.24 37.926,-92.551 38.957,-93.582 38.957,-95.69 44.34,-101.073 P2.24
NetC4_1: C4.1 J9.1 R7.2 U2.3 | length 99.5
  Top Layer w0.305: R7.2 v1(15.659,-74.206)
  Top Layer w0.508: C4.1 60.744,-117.481 U2.3 64.944,-110.777 J9.1
  Signal Layer 1 w0.305: v1(15.659,-74.206) 63.919,-74.206 66.323,-76.61 J9.1
NetC11_2: C11.2 L1.2 R11.2 U3.1 | length 16
  Top Layer w0.508: U3.1 40.524,-33.593 C11.2 48.595,-31.464 L1.2 46.883,-30.839 R11.2
NetD1_1: D1.1 R7.1 | length 2.2
  Top Layer w0.508: D1.1 R7.1
NetD2_1: D2.1 R8.1 | length 2.2
  Top Layer w0.508: D2.1 R8.1
NetD3_1: D3.1 R9.1 | length 2.2
  Top Layer w0.508: D3.1 R9.1
NetD4_1: D4.1 R10.1 | length 2.2
  Top Layer w0.508: D4.1 R10.1
NetIC1_2: IC1.2 J11.3 R4.2 | length 8.7
  Top Layer w0.305: J11.3 9.899,-48.273 R4.2@10.329,-47.844 ; IC1.2 R4.2@10.329,-47.844 ; R4.2 R4.2@10.329,-47.844
NetIC2_2: IC2.2 J11.2 R6.2 | length 9.5
  Top Layer w0.305: J11.2 7.798,-47.023 IC2.2 10.333,-41.49 R6.2
NetJ12_2: J12.2 P1.4 | length 10.6
  Top Layer w0.305: J12.2 7.506,-54.278 10.417,-57.188 12.492,-57.188 P1.4
NetJ12_3: J12.3 P1.3 | length 7.6
  Top Layer w0.305: J12.3 8.042,-55.528 10.965,-58.451 P1.3
NetL2_1: L2.1 U4.VS1 | length 12
  Top Layer w0.305: U4.VS1@12.484,-2.52 13.484,-2.52 14.484,-2.52 15.484,-2.52 U4.VS1@16.484,-2.52 ; U4.VS1@12.484,-1.52 13.484,-1.52 14.484,-1.52 15.484,-1.52 U4.VS1@16.484,-1.52 ; U4.VS1@12.484,-0.52 13.484,-0.52 14.484,-0.52 15.484,-0.52 U4.VS1@16.484,-0.52
NetP1_5: P1.5 U1.9 | length 71.4
  Signal Layer 1 w0.305: P1.5 12.119,-60.991 13.275,-59.834 59.652,-59.834 64.795,-54.691 64.795,-50.005 68.7,-46.1 71.197,-46.1 U1.9
NetP1_6: P1.6 U1.10 | length 71.4
  Signal Layer 1 w0.305: P1.6 59.209,-60.991 65.3,-54.9 65.3,-50.214 68.909,-46.605 73.232,-46.605 U1.10
NetR12_1: R12.1 U4.SCL U4.SDA U4.SGND | length 5.3
  Top Layer w0.254: U4.SGND@7.484,-13.52 8.484,-13.52 8.484,-12.52 U4.SGND@7.484,-12.52
  Top Layer w0.508: U4.SCL 12.484,-15.496 R12.1
NetR12_2: R12.2 U4.ADJ | length 3.4
  Top Layer w0.508: U4.ADJ 15.484,-16.296 R12.2
PWM8: J1.13 J2.13 J3.13 J4.13 J8.2 P2.1 | length 172.8
  Top Layer w0.305: v1(21.501,-49.06) 21.501,-49.116 J2.13
  Bottom Layer w0.254: P2.1 17.8,-102.94 17.8,-101.042 19.342,-99.5 23.025,-99.5 24.887,-97.638 24.887,-96.52 23.866,-95.499 J1.13 23.866,-57.353 24.887,-56.332 24.887,-54.61 23.866,-53.589 23.866,-39.789 ; 23.846,-39.769 23.866,-39.789 ; J4.13 23.866,29.967 24.887,28.946 24.887,27.488 23.866,26.467 23.866,-11.679 24.887,-12.7 24.887,-14.422 23.866,-15.443 23.866,-39.789
  Bottom Layer w0.305: J8.2 18.306,-39.769 21.501,-42.964 v1(21.501,-49.06)
PWM9: J1.14 J2.14 J3.14 J4.14 P2.3 | length 145.5
  Top Layer w0.254: P2.3 18.94,-104.227 20.349,-102.818 20.349,-101.332 21.012,-100.669 22.498,-100.669 25.385,-97.782 25.385,-96.784 26.157,-96.012 26.157,-94.58 25.395,-93.818 25.395,-92.82 25.126,-92.551 J1.14 25.126,-56.131 25.341,-55.916 25.341,-54.918 26.157,-54.102 26.157,-52.67 25.395,-51.908 25.395,-50.91 25.126,-50.641 J2.14 25.038,-49.483 25.038,-14.309 25.341,-14.006 25.341,-13.008 26.157,-12.192 26.157,-10.76 25.395,-9.998 25.395,-9 25.126,-8.731 25.126,27.689 25.341,27.904 25.341,28.902 26.157,29.718 26.157,30.856 25.126,31.887 J4.14
Rx1: J1.15 J2.15 J3.15 J4.15 P2.5 | length 142.6
  Bottom Layer w0.254: P2.5 21.48,-103.399 22.889,-101.99 22.889,-101.332 23.552,-100.669 24.416,-100.669 27.447,-97.638 27.447,-96.52 26.655,-95.728 26.655,-94.73 26.426,-94.501 J1.15 26.426,-92.281 26.611,-92.096 26.611,-57.168 27.447,-56.332 27.447,-54.61 26.655,-53.818 26.655,-52.82 26.426,-52.591 J2.15 26.426,-50.371 26.611,-50.186 26.611,-15.258 27.447,-14.422 27.447,-12.7 26.655,-11.908 26.655,-10.91 26.426,-10.681 J3.15 26.426,-8.461 26.611,-8.276 26.611,26.652 27.447,27.488 27.447,28.946 26.426,29.967 J4.15
Rx2: J1.17 J2.17 J3.17 J4.17 P2.9 | length 141.1
  Bottom Layer w0.254: P2.9 27.969,-102.931 27.969,-101.332 29.6,-99.701 29.6,-98.56 30.007,-98.153 30.007,-96.52 29.215,-95.728 29.215,-94.73 28.986,-94.501 J1.17 28.986,-92.281 29.171,-92.096 29.171,-57.168 30.007,-56.332 30.007,-54.61 29.215,-53.818 29.215,-52.82 28.986,-52.591 28.986,-50.371 29.171,-50.186 29.171,-15.258 30.007,-14.422 30.007,-12.7 29.215,-11.908 29.215,-10.91 28.986,-10.681 28.986,-8.461 29.171,-8.276 29.171,26.652 30.007,27.488 30.007,28.946 28.986,29.967 J4.17
SCL1: J1.2 J2.2 J3.2 J4.2 P1.1 P2.4 R2.1 U1.4 | length 210.6
  Top Layer w0.254: R2.1 24.081,-29.516 24.095,-29.502 ; P2.4 20.525,-100.215 22.31,-100.215 24.931,-97.594 24.931,-96.596 25.126,-96.401 J1.2 25.126,-94.191 24.941,-94.006 24.941,-93.008 24.095,-92.162 24.095,-56.52 24.887,-55.728 24.887,-54.73 25.126,-54.491 J2.2 25.126,-52.281 24.941,-52.096 24.941,-51.098 24.095,-50.252 24.095,-29.502 ; J4.2 25.126,29.329 24.887,29.09 24.887,28.092 24.095,27.3 24.095,-8.342 24.941,-9.188 24.941,-10.186 25.126,-10.371 25.126,-12.581 24.887,-12.82 24.887,-13.818 24.095,-14.61 24.095,-29.502
  Top Layer w0.305: P1.1 13.733,-53.391 J2.2
  Signal Layer 1 w0.305: v1(21.374,-29.502) 23.467,-29.502 27.604,-25.364 59.783,-25.364 64.796,-30.378 66.6,-30.378 U1.4
SCL2: IC1.3 J1.4 J2.4 J3.4 J4.4 P2.8 R3.2 | length 153.6
  Top Layer w0.254: P2.8 27.491,-98.329 27.491,-96.596 27.686,-96.401 J1.4 27.686,-94.191 27.501,-94.006 27.501,-93.008 26.655,-92.162 26.655,-91.054 27.491,-90.218 27.491,-54.686 27.686,-54.491 27.686,-52.281 27.501,-52.096 27.501,-51.098 26.655,-50.252 26.655,-14.61 27.447,-13.818 27.447,-12.536 27.686,-12.297 27.686,-10.371 27.501,-10.186 27.501,-9.188 26.655,-8.342 26.655,27.3 27.447,28.092 27.447,29.09 27.686,29.329 J4.4
  Top Layer w0.305: IC1.3 13.993,-49.888 R3.2 14.082,-49.949 v1(15.532,-49.949)
  Signal Layer 1 w0.305: v1(15.532,-49.949) 23.828,-49.949 25.37,-51.491 25.37,-51.919 25.988,-52.538 26.832,-52.538 J2.4
SDA1: J1.1 J2.1 J3.1 J4.1 P1.2 P2.2 R1.1 U1.5 | length 201.8
  Top Layer w0.254: R1.1 16.471,-28.486 v1(22.517,-28.486)
  Top Layer w0.305: P1.2 14.363,-55.301 J2.1
  Signal Layer 1 w0.305: v1(22.517,-28.486) 23.539,-27.464 24.791,-27.464 27.395,-24.86 61.055,-24.86 U1.5
  Bottom Layer w0.254: P2.2 17.2,-101 20.989,-97.211 J1.1 23.856,-96.131 22.835,-95.11 22.835,-57.742 23.856,-56.721 23.856,-54.221 22.518,-52.883 22.518,-50.291 22.536,-50.273 22.536,-49.626 22.518,-49.608 22.518,-16.149 23.856,-14.811 23.856,-12.311 22.835,-11.29 22.835,26.078 23.856,27.099 J4.1
SDA2: IC2.3 J1.3 J2.3 J3.3 J4.3 P2.6 R5.2 | length 150.9
  Top Layer w0.305: IC2.3 13.997,-43.538 R5.2 v1(15.518,-43.613)
  Signal Layer 1 w0.305: v1(15.518,-43.613) 22.023,-43.613 v1(25.819,-47.409)
  Bottom Layer w0.254: P2.6 23.065,-100.215 23.412,-100.215 J1.3 26.416,-96.131 26.201,-95.916 26.201,-94.918 25.395,-94.112 25.395,-92.67 26.157,-91.908 26.157,-91.054 25.972,-90.869 25.972,-57.165 26.416,-56.721 26.416,-54.221 26.201,-54.006 26.201,-53.008 25.395,-52.202 25.395,-50.76 26.157,-49.998 26.157,-49.144 25.972,-48.959 25.972,-15.255 26.416,-14.811 26.416,-12.311 26.201,-12.096 26.201,-11.098 25.395,-10.292 25.395,-8.85 26.157,-8.088 26.157,-7.234 25.972,-7.049 25.972,26.655 26.416,27.099 J4.3
THR0: J1.5 J2.5 J3.5 J4.5 J5.1 P2.10 | length 159.8
  Signal Layer 1 w0.305: J5.1 25.667,-16.7 J3.5
  Bottom Layer w0.254: P2.10 28.976,-99.384 J1.5 28.976,-96.131 28.761,-95.916 28.761,-94.918 27.955,-94.112 27.955,-92.67 28.717,-91.908 28.717,-91.054 28.532,-90.869 28.532,-57.165 28.976,-56.721 28.976,-54.221 28.761,-54.006 28.761,-53.008 27.955,-52.202 27.955,-50.76 28.717,-49.998 28.717,-49.144 28.532,-48.959 28.532,-15.255 28.976,-14.811 28.976,-12.311 28.761,-12.096 28.761,-11.098 27.955,-10.292 27.955,-8.85 28.717,-8.088 28.717,-7.234 28.532,-7.049 28.532,26.655 28.976,27.099 J4.5
THR1: J1.6 J2.6 J3.6 J4.6 J5.2 P2.12 | length 164.7
  Top Layer w0.254: P2.12 30.246,-100.654 30.246,-98.021 30.051,-97.826 30.051,-96.596 30.246,-96.401 J1.6 30.246,-94.191 30.061,-94.006 30.061,-93.008 29.215,-92.162 29.215,-56.52 30.007,-55.728 30.007,-54.73 30.246,-54.491 30.246,-52.281 30.061,-52.096 30.061,-51.098 29.215,-50.252 29.215,-14.61 30.007,-13.818 30.007,-12.82 30.246,-12.581 30.246,-10.371 30.061,-10.186 30.061,-9.188 29.215,-8.342 29.215,27.3 30.007,28.092 30.007,29.09 30.246,29.329 J4.6
  Signal Layer 1 w0.305: J5.2 25.911,-17.95 30.246,-13.615 J3.6
THR2: J1.7 J2.7 J3.7 J4.7 J5.3 P2.14 | length 162.4
  Signal Layer 1 w0.305: J5.3 25.727,-19.2 J3.7
  Bottom Layer w0.254: J4.7 31.536,27.099 31.092,26.655 31.092,-7.049 31.277,-7.234 31.277,-8.088 30.515,-8.85 30.515,-10.292 31.321,-11.098 31.321,-12.096 31.536,-12.311 31.536,-14.811 31.092,-15.255 31.092,-48.959 31.277,-49.144 31.277,-49.998 30.515,-50.76 30.515,-52.202 31.321,-53.008 31.321,-54.006 31.536,-54.221 31.536,-56.721 31.092,-57.165 31.092,-90.869 31.277,-91.054 31.277,-91.908 30.515,-92.67 30.515,-94.112 31.321,-94.918 31.321,-95.916 31.536,-96.131 J1.7 31.536,-100.633 31.64,-100.737 P2.14
THR3: J1.8 J2.8 J3.8 J4.8 J5.4 P2.15 | length 171
  Top Layer w0.254: J4.8 32.806,29.329 32.567,29.09 32.567,28.092 31.775,27.3 31.775,-8.342 32.621,-9.188 32.621,-10.186 32.806,-10.371 32.806,-12.475 32.567,-12.714 32.567,-13.818 31.775,-14.61 31.775,-50.252 32.621,-51.098 32.621,-52.096 32.806,-52.281 32.806,-54.491 32.567,-54.73 32.567,-55.728 31.775,-56.52 31.775,-92.162 32.621,-93.008 32.621,-94.006 32.806,-94.191 J1.8 32.806,-96.401 32.611,-96.596 32.611,-97.826 32.806,-98.021 32.806,-102.966 P2.15
  Signal Layer 1 w0.305: J5.4 25.971,-20.45 32.806,-13.615 J3.8
THR4: J1.9 J2.9 J3.9 J4.9 J6.1 P2.17 | length 170.6
  Signal Layer 1 w0.305: J6.1 23.533,-23.954 J3.9